# Altium PCB 5V_1A_PCB.PcbDoc
Units mil, origin at the board's own origin, x right, y up, seen from the top; angles counter-clockwise.
Board outline 1845 x 1195 mil, 2 copper layers (Top Layer, Bottom Layer), stack 61.756 mil thick; 15 components, 8 nets, 41 pads, 24 vias.
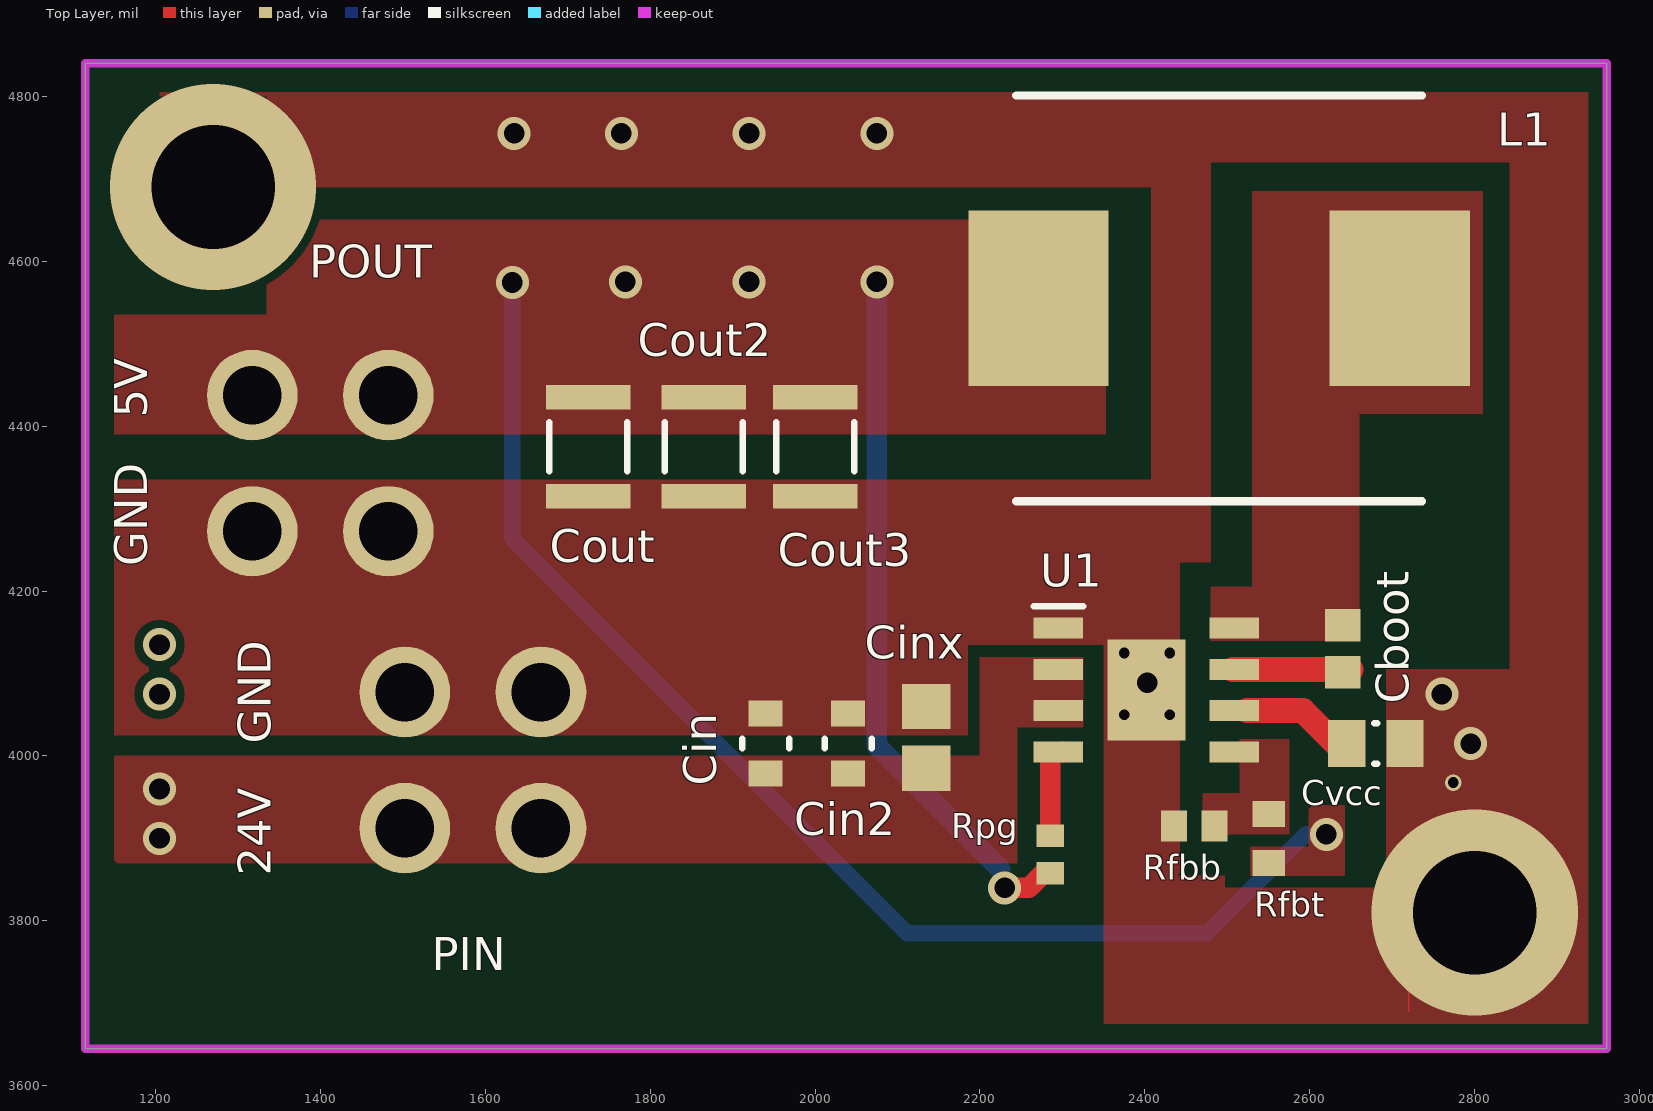
[diagram p0: Top Layer view]
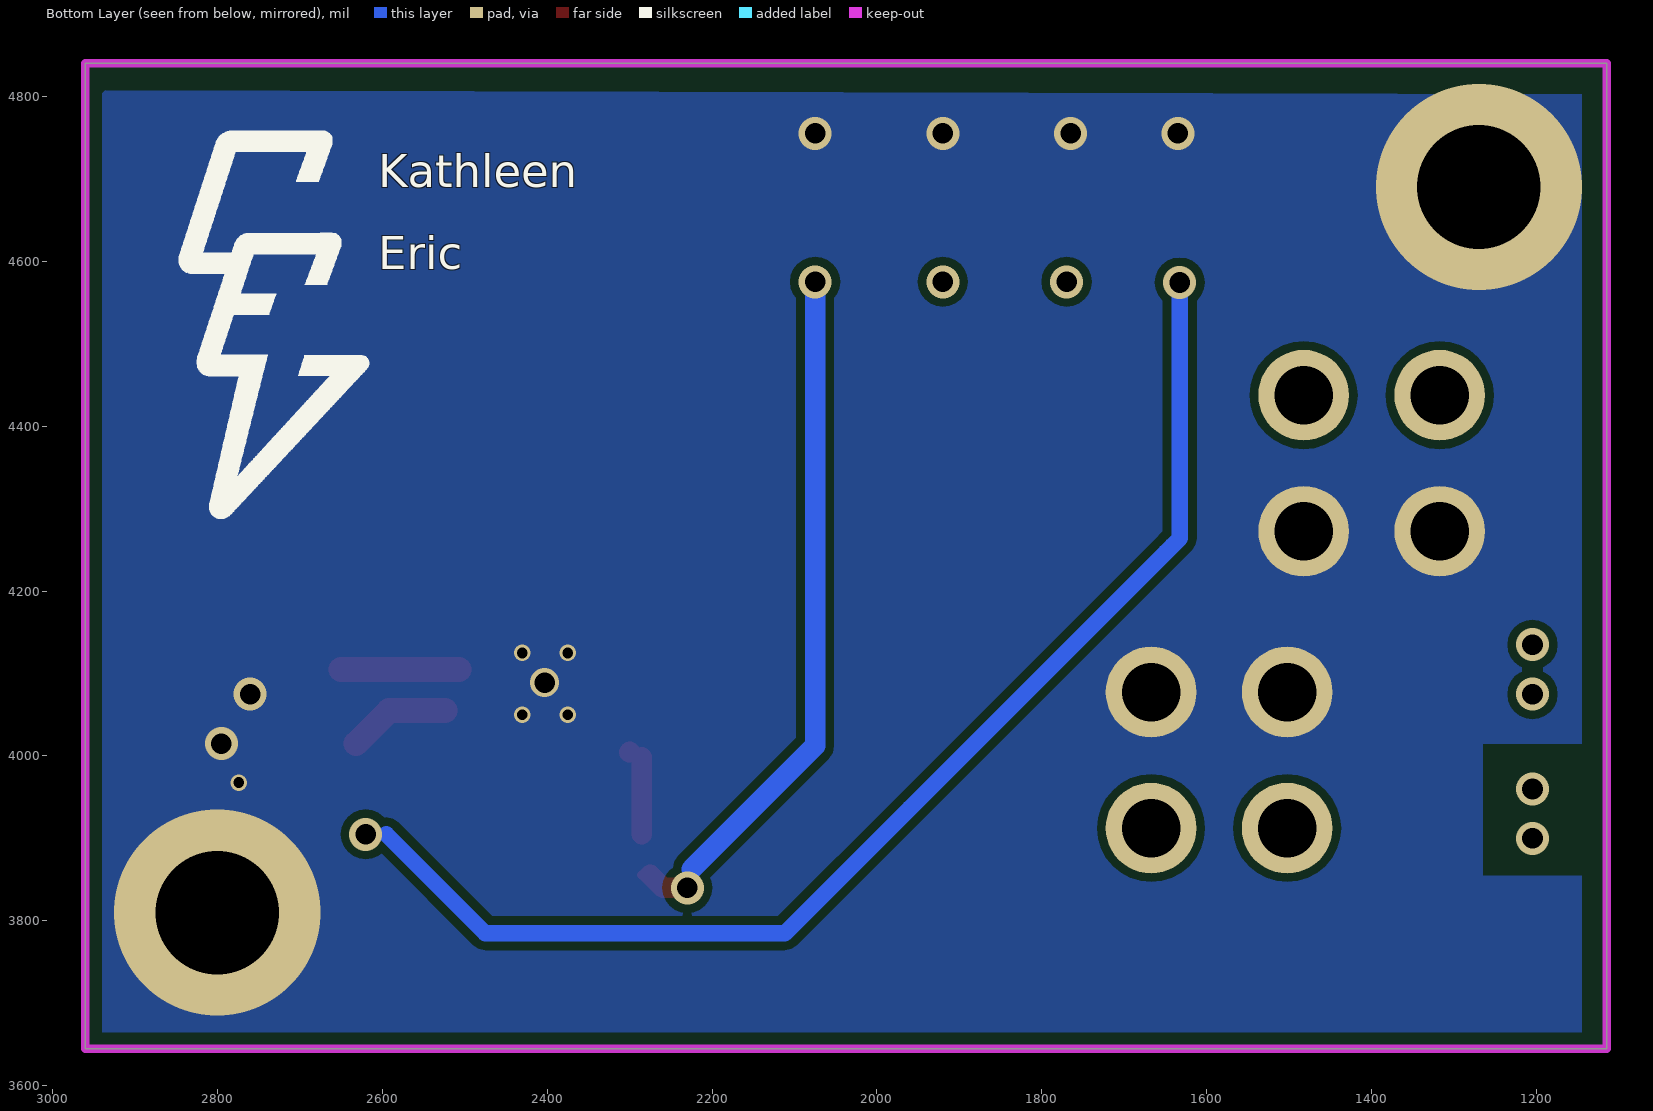
[diagram p1: Bottom Layer view, seen from below]

## Layer stack, top to bottom
Top Solder: solder mask 1, SM-001, Dk 4
Top Layer: signal copper 1.378
Dielectric 1: core 59, Core-043, Dk 4.3
Bottom Layer: signal copper 1.378
Bottom Solder: solder mask 1, SM-001, Dk 4

## Board outline
1115,3645 2960,3645 2960,4840 1115,4840

## Design rules (kind name [scope] priority, off if disabled: settings)
Clearance [All] p1: gap=10 ignorepadtopadclearanceinfootprint=FALSE except(0: Arc-Hole Track-Hole SMDPad-Hole THPad-Hole Via-Hole Fill-Hole Poly-Hole Region-Hole Text-Hole)
PolygonConnect [All] p1: connectstyle=Direct reliefconductorwidth=10 reliefentries=4 polygonreliefangle="90 Angle" airgapwidth=10
RoutingVias [All] p1: holewidth=28 width=50 viastyle="Through Hole" minholewidth=10 minwidth=20 maxholewidth=28 maxwidth=50
SolderMaskExpansion [All] p1: expansion=4 istentingtop=FALSE
Width [All] p1: maxlimit=50 minlimit=10 preferedwidth=12
30 further rules are at their usual default settings.

## Components (designator, comment, footprint, x,y, rotation, side; value= is the part's Value field where it differs from the comment)
Cboot "C0603C104M4RACTU" CAPC1608X87X35ML15T15 2640,4130 r90 top
Cin "C2012X5R1H475K125AB" FP-C2012-125-MFG 1940,4015 r90 top value=4.7uF
Cin2 "C2012X5R1H475K125AB" FP-C2012-125-MFG 2040,4015 r90 top value=4.7uF
Cinx "GRM21BR71H224MA01L" CAPC2013X135X45ML10T25 2135,4022.6 r270 top
Cout "GRM32ER61C476KE15L" MURA-1210_H_2.7_L 1725,4375 r90 top
Cout2 "GRM32ER61C476KE15L" MURA-1210_H_2.7_L 1865,4375 r90 top
Cout3 "GRM32ER61C476KE15L" MURA-1210_H_2.7_L 2000,4375 r90 top
Cvcc "CAP 1uF 16V 0805(2012)" CAPC0805(2012)100_N 2680,4015 r180 top value=1uF
L1 "SRR1280-120M" SRR1280-120M 2490,4555 r180 top
PIN "Header" "MINIFITJR 2X2" 1585,3995 r90 top
POUT "Header" "MINIFITJR 2X2" 1400,4355 r270 top
Rfbb "CRCW060324K9FKEA" RESC1609X50X30NL10T20 2460,3915 r0 top
Rfbt "RC0603FR-07100KL" RESC1608X55X25ML10T15 2550,3900 r270 top
Rpg "CRCW0603100KFKEA" RESC1609X50X30LL10T20 2285,3880.48 r90 top
U1 "LMR36520ADDAR" SOIC127P600X170-9N 2401.77,4080 r0 top

## Footprints (in the part's own frame and the unit in brackets; to place one, negate y for a bottom-side part, rotate by r counter-clockwise, add the part's x,y. Pads: shape width x height; smd on the part's side, far side on the other; paste and mask are expansions set on the pad)
CAPC0805(2012)100_N [mm] "Chip Capacitor, Body 2.0x1.2mm, Height 1.0mm, IPC Medium Density"
  rect 1.15x1.45 smd: 1(-0.9,0) 2(0.9,0)
  silkscreen extent -0.05,-0.62 0.05,0.63, body extent -1.1,-0.72 1.1,0.73, height 1
CAPC1608X87X35ML15T15 [mm] "Chip Capacitor, 2-Leads, Body 1.60x0.80mm, IPC Low Density"
  rect 1x1.1 smd: 1(-0.725,0) 2(0.725,0)
  body extent -0.87,-0.48 0.87,0.47, height 0.87
CAPC2013X135X45ML10T25 [mm] "Chip Capacitor, 2-Leads, Body 2.00x1.25mm, IPC Low Density"
  rect 1.4x1.5 smd: 1(-0.95,0) 2(0.95,0)
  body extent -1.05,-0.67 1.05,0.67, height 1.35
FP-C2012-125-MFG [mm]
  rect 0.8x1.05 smd paste+0 mask+0: 1(-0.925,0) 2(0.925,0)
  silkscreen extent -0.15,-0.72 0.15,0.72, body extent -1.43,-0.82 1.43,0.82, height 0.25
"MINIFITJR 2X2" [mil]
  round 110 hole 71: 1(82.5,-82.5) 2(-82.5,-82.5) 3(82.5,82.5) 4(-82.5,82.5)
MURA-1210_H_2.7_L [mm] "Chip Capacitor, 2-Leads, Body 3.5x2.7mm, IPC High Density"
  rect 0.75x2.6 smd: 1(-1.525,0) 2(1.525,0)
  silkscreen extent -0.75,-1.2 0.75,1.2, body extent -1.75,-1.35 1.75,1.35, height 2.7
RESC1608X55X25ML10T15 [mm] "Chip Resistor, 2-Leads, Body 1.60x0.80mm, IPC Low Density"
  rect 0.8x1 smd: 1(-0.75,0) 2(0.75,0)
  body extent -0.85,-0.45 0.85,0.45, height 0.55
RESC1609X50X30LL10T20 [mm] "Chip Resistor, 2-Leads, Body 1.55x0.85mm, IPC High Density"
  rect 0.7x0.85 smd: 1(-0.575,0) 2(0.575,0)
  body extent -0.82,-0.48 0.82,0.48, height 0.5
RESC1609X50X30NL10T20 [mm] "Chip Resistor, 2-Leads, Body 1.55x0.85mm, IPC Medium Density"
  rect 0.8x0.95 smd: 1(-0.625,0) 2(0.625,0)
  body extent -0.82,-0.48 0.82,0.48, height 0.5
SOIC127P600X170-9N [mm]
  rect 1.525x0.65 smd: 1(-2.712,1.905) 2(-2.712,0.635) 3(-2.712,-0.635) 4(-2.712,-1.905) 5(2.712,-1.905) 6(2.712,-0.635) 7(2.712,0.635) 8(2.712,1.905)
  rect 2.4x3.1 smd: 9(0,0)
  silkscreen extent -3.47,2.58 -1.95,2.58, body extent -3,-2.45 3,2.45, height 1.7
SRR1280-120M [mil]
  rect 170x213 smd: 1(-219,0)
  rect 170x213 smd mask+6: 2(219,0)
  silkscreen extent -246,-246 246,246

## Part data
Cboot: library part CMP-2006-03067-1, Manufacturer=Kemet, Part Number=C0603C104M4RACTU
Cin Cin2: library part CMP-08246-000007-1, "CAP CER 4.7UF 50V X5R 0805", Capacitance=4.7uF, Manufacturer="TDK Corporation", Package=C2012-125, Temperature="-55°C to +85°C", Temperature Characteristic=X5R, Temperature Coefficient=15%, Temperature Range High=+85°C, Temperature Range Low=-55°C, Tolerance=10%, Voltage Rating=50V, Automotive=No, Category=Cap, ComponentLink2Description=Datasheet, ComponentLink2URL=https://product.tdk.com/info/en/catalog/datasheets/mlcc_commercial_general_en.pdf, Device Class L1="Passive Components", Device Class L2=Capacitors, Device Class L3="Ceramic Capacitors", Digikey Description="CAP CER 4.7UF 50V X5R 0805", Height=1.45mm, Lead Free=Yes, Manufacturer Part Number=C2012X5R1H475K125AB, Material=Ceramic, Mouser Description="Multilayer Ceramic Capacitors MLCC - SMD/SMT 0805 4.7uF 50volts X5R 10%", Octopart=https://octopart.com/c2012x5r1h475k125ab-tdk-25947720, RoHS=TRUE
Cinx: library part CMP-2007-03584-1, Manufacturer=Murata, Part Number=GRM21BR71H224MA01L
Cout Cout2 Cout3: library part CMP-2000-06362-1, "Cap Ceramic, 47 uF, +/- 10%, -55 to 85 degC, 2-Pin SMD (1210), RoHS, Tape and Reel", Capacitance=47µF, Manufacturer=Murata, Operating Temperature=-55°C~85°C, Package / Case=1210(3225Metric), Package Description="2-Pin Surface Mount Device, Body 3.2 x 2.5 mm", Package Reference=1210, Ratings=-, Standard Package=1, Temperature Coefficient=X5R, Tolerance=±10%, Voltage - Rated=16V, Applications=GeneralPurpose, Catalog Drawings=GRMSeries_1210_2.5, Category=Capacitors, Datasheet URL=http://psearch.en.murata.com/capacitor/product/GRM32ER61C476KE15%23.pdf, Datasheet Version=04/2016, Family=CeramicCapacitors, Features=-, Height - Seated (Max)=-, Lead Spacing=-, Lead Style=-, Manufacturer URL=http://www.murata.com/, Mounting Technology=SurfaceMount, Mounting Type=SurfaceMount,MLCC, Online Catalog=GRMSeries, Other Names=490-6539-6, Packaging=Digi-Reel®, Product Training Modules=High-CapMultilayerCeramicCapacitors, Series=GRM, Size / Dimension="0.126\"Lx0.098\"W(3.20mmx2.50mm)", Thickness (Max)="0.106\"(2.70mm)", Voltage Rating Dc=16V
Cvcc: library part CMP-1036-04747-1, "CAP 1uF 16V ±10% 0805 (2012 Metric) Thickness 1mm SMD", Case-EIA=0805, Case-Metric=2012, Rated Voltage="16 V", Tolerance=Â±10%, Max Thickness="1 mm", Technology=SMT
PIN POUT: library part "MiniFit Jr 2x2", "Header, 2x2"
Rfbb: library part CMP-2000-03121-1, Manufacturer="Vishay Dale", Part Number=CRCW060324K9FKEA
Rfbt: library part CMP-2100-03662-1, "Chip Resistor, 100 KOhm, +/- 1%, 0.1 W, -55 to 155 degC, 0603 (1608 Metric), RoHS, Tape and Reel", Case Code (Imperial)=0603, Case Code (Metric)=1608, Manufacturer=Yageo, Max Operating Temperature=155degC, Min Operating Temperature=-55degC, Package Description="2-Pin Surface Mount Device, Body 1.6 x 0.8 mm", Power Rating=100mW, Resistance=100KOhm, Temperature Coefficient=100ppm/degreesC, Tolerance=1%, Voltage Rating=50V, Case/Package=0603, Composition=ThickFilm, Datasheet URL=http://www.yageo.com/NewPortal/yageodocoutput?fileName=/pdf/R-Chip/PYu-RC_Group_51_RoHS_L_5.pdf, Datasheet Version="Rev. 5, 10/2016", Depth=0.8mm, Height=0.45mm, Lead Free=LeadFree, Length=1.6mm, Manufacturer URL=http://www.yageo.com/, Military Standard=Not, Number of Pins=2, Package Reference=0603, Packaging=TapeandReel, REACH SVHC=NoSVHC, RoHSCompliant=true, Termination=SMD/SMT, Voltage Rating (DC)=50V, Width=0.8mm
Rpg: library part CMP-2000-03820-1, Manufacturer="Vishay Dale", Part Number=CRCW0603100KFKEA
U1: "Integrated Circuit", Manufacturer_Name="Texas Instruments", Mouser Part Number=595-LMR36520ADDAR, Arrow Part Number=LMR36520ADDAR, Arrow Price/Stock=https://www.arrow.com/en/products/lmr36520addar/texas-instruments, Datasheet Link=http://www.ti.com/general/docs/suppproductinfo.tsp?distId=10&gotoUrl=http%3A%2F%2Fwww.ti.com%2Flit%2Fgpn%2Flmr36520, Height=1.7mm, Manufacturer_Part_Number=LMR36520ADDAR, Mouser Price/Stock=https://www.mouser.co.uk/ProductDetail/Texas-Instruments/LMR36520ADDAR?qs=vHuUswq2%252Bsxe%2FiIOFannaw%3D%3D

## Via types
v1: diameter 40, hole 25, Top Layer to Bottom Layer, 16 vias
v2: diameter 20, hole 13, Top Layer to Bottom Layer, 5 vias
v3: diameter 250, hole 150, Top Layer to Bottom Layer, 2 vias
v4: diameter 35, hole 25, Top Layer to Bottom Layer, 1 vias

## Nets (pads, with @x,y where several pads share a name; then routed paths per layer and width w, separated by ;. In a path a pad name is that pad's centre, name@x,y a point inside that pad or via, vN(x,y) a via of type N, cw(c..) or ccw(c..) an arc to the next point about the centre after c; other vN are vias at no path point)
5V: Cout2.2 Cout3.2 Cout.2 L1.2 POUT.2 POUT.4 Rfbt.2 Rpg.1 | length 2384.1
  Top Layer w12: Rpg.1@2274.84,3855.69 Rpg.1@2285,3855.69 ; Rpg.1@2274.84,3857.85 Rpg.1@2274.84,3860.64
  Top Layer w25: v1(2230,3840) 2259.15,3840 Rpg.1@2274.84,3855.69
  Bottom Layer w15: 2595,3905 v1(2620,3905)
  Bottom Layer w20: v1(1632.83,4574.23) 1632.83,4263.79 1641.62,4255 1649.45,4247.17 1959.99,3936.63 2111.62,3785 2475,3785 2595,3905
  Bottom Layer w25: v1(2075,4575) 2075,4012.48 2224.63,3862.85
  other v1: 1770,4575 1920,4575
24V_BAT: Cin2.1 Cin.1 Cinx.2 PIN.2 PIN.4 U1.2 U1.3
  other v1: 1205,3900 1205,3960
GND: Cin2.2 Cin.2 Cinx.1 Cout2.1 Cout3.1 Cout.1 Cvcc.1 PIN.1 PIN.3 POUT.1 POUT.3 Rfbb.1 U1.1 U1.9
  other v1: 2795,4015 2760,4075 1635,4755 1765,4755 1920,4755 2075,4755
  other v2: 2773.84,3967.8 2375,4050 2430,4050 2375,4125 2430,4125
  other v3: 2800,3810 1270,4690
  other v4: 2403,4089
NetCboot_1: Cboot.1 U1.7 | length 143.2
  Top Layer w30: U1.7@2506.77,4105 Cboot.1@2650,4105
NetCboot_2: Cboot.2 L1.1 U1.8
NetCvcc_2: Cvcc.2 U1.6 | length 124.7
  Top Layer w30: U1.6@2523.56,4055 2591.69,4055 Cvcc.2@2631.69,4015
NetRfbb_2: Rfbb.2 Rfbt.1 U1.5
NetRpg_2: Rpg.2 U1.4 | length 110.9
  Top Layer w12: U1.4@2285,3998.2 2291.8,4005 U1.4 U1.4@2299.7,4005
  Top Layer w25: Rpg.2@2285,3905.28 U1.4@2285,3998.2 ; U1.4@2299.7,4005 U1.4@2300,4004.7
copper on no net:
  other v1: 1205,4075 1205,4135

## Polygon pours and split planes (outlines as drawn)
5V on Top Layer "5V_L01_P025" (solid, pour order 25): 2598.6,3865 2598.6,3938.6 2600,3940 2642.5,3940 2642.5,3865
GND on Top Layer "GND_L01_P024" (solid, pour order 24): 2460,4690 1205,4690 1205,4805 2460,4805
GND on Top Layer "GND_L01_P023" (solid, pour order 23): 2435,4235 2480,4235 2480,4730 2435,4730
NetCboot_2 on Top Layer "NETCBOOT_2_L01_P022" (solid, pour order 22): 2660,4140 2660,4415 2810,4415 2810,4685 2480,4685 2480,4140
GND on Top Layer "GND_L01_P021" (solid, pour order 21): 2350,4805 2937.52,4805 2937.52,3675 2350,3675 2350,3855 2496.64,3855 2496.64,3840 2692.52,3840 2692.52,4105 2842.52,4105 2842.52,4720 2442.52,4720 2442.52,3855 2350,3855
24V_BAT on Top Layer "Top Layer-24V_BAT" (solid, pour order 18): 2245,3990 2245,4035 2325,4035 2325,4120 2200,4120 2200,4035 2200,4000 1150,4000 1150,3870 2245,3870
GND on Top Layer "GND_L01_P010" (solid, pour order 10): 2365,4335 1150,4335 1150,4025 2185,4025 2185,4135 2365,4135
5V on Top Layer "5V_L01_P009" (solid, pour order 9): 1150,4650 2370,4650 2370,4390 1150,4390
no net on Top Layer "NONET_L01_P006" (solid, pour order 6): 2720,3820 2720,3780 2720,3690
5V on Top Layer "5V_L01_P005" (solid, pour order 5): 2527.5,3890 2642.5,3890 2642.5,3855 2527.5,3855
NetRfbb_2 on Top Layer "NETRFBB_2_L01_P004" (solid, pour order 4): 2515,4020 2575,4020 2575,3905 2470,3905 2470,3955 2515,3955
GND on Top Solder "NONET_L-01_P-001" (solid): 2350,4085 2350,3971.73 2450,3971.73 2450,4085
GND on Top Solder "NONET_L-01_P-001" (solid): 2350,4235 2350,4105 2450,4105 2450,4235
GND on Bottom Layer "GND_L04_P016" (solid, pour order 16): 1145,4802.49 1145,3665 2939.58,3665 2939.58,4807.38

## Keep-outs
Keep-Out Layer:
  lines w10: 1115,3645 2960,3645 2960,4083.75 2960,4511.25 2960,4840 1115,4840 1115,3645

## Other copper
Top Layer:
  pour cut-out: 2352.5,4690 2407.5,4690 2407.5,4335 2352.5,4335
  pour cut-out: 2480,4205 2530,4205 2530,4685 2480,4685
  pour cut-out: 1130,4535 1335,4535 1335,4800 1130,4800
Bottom Layer:
  pour cut-out: 1120,4015 1120,3855 1265,3855 1265,4015

## Silkscreen, mask and mechanical layers (free items; w line width, h text height)
Top Overlay:
  text "5V" at 1190,4410 h40 r90
  text "GND" at 1190,4230 h40 r90
  text "GND" at 1340,4015 h40 r90
  text "24V" at 1340,3855 h40 r90
Bottom Overlay:
  region: 4199 vertices and 0 holes, not listed, extent 2615.93,4287.44 2846.94,4757.95
  text "Kathleen" at 2605,4690 h40
  text "Eric" at 2605,4590 h40